# EAGLE board AtmegBROKE (EAGLE 6.2)

Size 34.9 x 25.4 mm. Coordinates in mm from the lower left corner, seen from the top.
Outline: 0,25.4 0.1,0 34.9,0 34.9,25.4 0,25.4
Copper layers (1*16): Top 0.035mm / dielectric 1.5mm / Bottom 0.035mm
Design rules: minimum track width 10mil, minimum drill 24mil, track to track 4mil, track to pad 4mil, pad to pad 8mil, via to via 8mil, smd to smd 8mil, copper to edge 10mil, drill to drill 8mil, minimum pad ring 10mil, minimum via ring 8mil, stop-mask expansion 4mil, vias tented up to drill 0mil, thermal gap 10mil

## Footprints (pad centres in the part's own frame; a part is rotated, then mirrored left to right if it is on the bottom)
1X02 = drill 1.016 long: 1 -1.27,0; 2 1.27,0
SMC_Z = smd 1 x 1.2: + -1,0; - 1,0
HC49UP = smd 5.334 x 1.93: 1 -4.826,0; 2 4.826,0
TQFP32-08 = smd 1.27 x 0.559: 1 -4.293,2.8; 2 -4.293,2; 3 -4.293,1.2; 4 -4.293,0.4; 5 -4.293,-0.4; 6 -4.293,-1.2; 7 -4.293,-2; 8 -4.293,-2.8; 17 4.293,-2.8; 18 4.293,-2; 19 4.293,-1.2; 20 4.293,-0.4; 21 4.293,0.4; 22 4.293,1.2; 23 4.293,2; 24 4.293,2.8 | smd 0.559 x 1.27: 9 -2.8,-4.293; 10 -2,-4.293; 11 -1.2,-4.293; 12 -0.4,-4.293; 13 0.4,-4.293; 14 1.2,-4.293; 15 2,-4.293; 16 2.8,-4.293; 25 2.8,4.293; 26 2,4.293; 27 1.2,4.293; 28 0.4,4.293; 29 -0.4,4.293; 30 -1.2,4.293; 31 -2,4.293; 32 -2.8,4.293
1X06 = drill 1.016 long: 1 -6.35,0; 2 -3.81,0; 3 -1.27,0; 4 1.27,0; 5 3.81,0; 6 6.35,0
1X08 = drill 1.016 long: 1 -8.89,0; 2 -6.35,0; 3 -3.81,0; 4 -1.27,0; 5 1.27,0; 6 3.81,0; 7 6.35,0; 8 8.89,0
1X04 = drill 1.016 long: 1 -3.81,0; 2 -1.27,0; 3 1.27,0; 4 3.81,0

## Placement (x,y rotation side)
+/-  [1X02]  3.84,22.99 0 top
C1  18pf  [SMC_Z]  22.27,17.65 15 top
C2  18pf  [SMC_Z]  27.8,18.58 195 top
C4  0.1µf  [SMC_Z]  2.7,15.8 90 top
CLOCK  16Mhz  [HC49UP]  26.6,12.94 15 top
IC1  MEGA8-AI  [TQFP32-08]  12.9,13.2 180 top
PORTB  [1X06]  14,23 180 top
PORTC  [1X08]  11.2,3 0 top
PORTD  [1X04]  26.8,2.9 0 top
PORTD2  [1X04]  26.7,23 180 top

## Library data of the parts
+/- PORTB PORTC PORTD PORTD2 = pinhead
C1 C2 C4 = rcl
CLOCK = crystal; OC_FARNELL: unknown; OC_NEWARK: unknown
IC1 = atmel; MPN: ATMEGA8-16AU; OC_FARNELL: 9171371; OC_NEWARK: 73M8863

## Nets
GND: +/-.1 C1.- C2.- C4.- IC1.3 IC1.5 IC1.21
N$1: C2.+ CLOCK.2 IC1.7
N$3: IC1.30 PORTD.1
N$5: IC1.23 PORTC.1
N$6: IC1.24 PORTC.2
N$7: C1.+ CLOCK.1 IC1.8
N$8: IC1.25 PORTC.3
N$9: IC1.26 PORTC.4
N$10: IC1.27 PORTC.5
N$11: IC1.28 PORTC.6
N$12: IC1.19 PORTC.7
N$13: IC1.22 PORTC.8
N$14: IC1.31 PORTD.2
N$15: IC1.32 PORTD.3
N$16: IC1.1 PORTD.4
N$17: IC1.2 PORTD2.1
N$18: IC1.9 PORTD2.2
N$19: IC1.10 PORTD2.3
N$20: IC1.11 PORTD2.4
N$22: IC1.12 PORTB.1
N$23: IC1.13 PORTB.2
N$25: IC1.14 PORTB.3
N$27: IC1.16 PORTB.5
N$28: IC1.17 PORTB.6
N$29: C4.+ IC1.20
N$30: IC1.15 PORTB.4
VCC: +/-.2 IC1.4 IC1.6 IC1.18

## Tracks (layer width: path | path; a pad name or v marks a point on that pad's centre or on a via)
GND  (6 unrouted)
N$1  (2 unrouted)
N$3  (1 unrouted)
N$5  (1 unrouted)
N$6  (1 unrouted)
N$7  (2 unrouted)
N$8  (1 unrouted)
N$9  (1 unrouted)
N$10  (1 unrouted)
N$11  (1 unrouted)
N$12  (1 unrouted)
N$13  (1 unrouted)
N$14  (1 unrouted)
N$15  (1 unrouted)
N$16  (1 unrouted)
N$17  (1 unrouted)
N$18  (1 unrouted)
N$19  (1 unrouted)
N$20  (1 unrouted)
N$22  (1 unrouted)
N$23  (1 unrouted)
N$25  (1 unrouted)
N$27  (1 unrouted)
N$28  (1 unrouted)
N$29  (1 unrouted)
N$30  (1 unrouted)
VCC  (3 unrouted)

## Text on the board
Top: Atmega8